# Altium PCB DIN-rail AC-DC 24V.PcbDoc
Units mm, origin at the board's own origin, x right, y up, seen from the top; angles counter-clockwise.
Board outline 80 x 106.5 mm, 2 copper layers (Top Layer, Bottom Layer), stack 1.57 mm thick; 50 components, 38 nets, 135 pads, 86 vias.
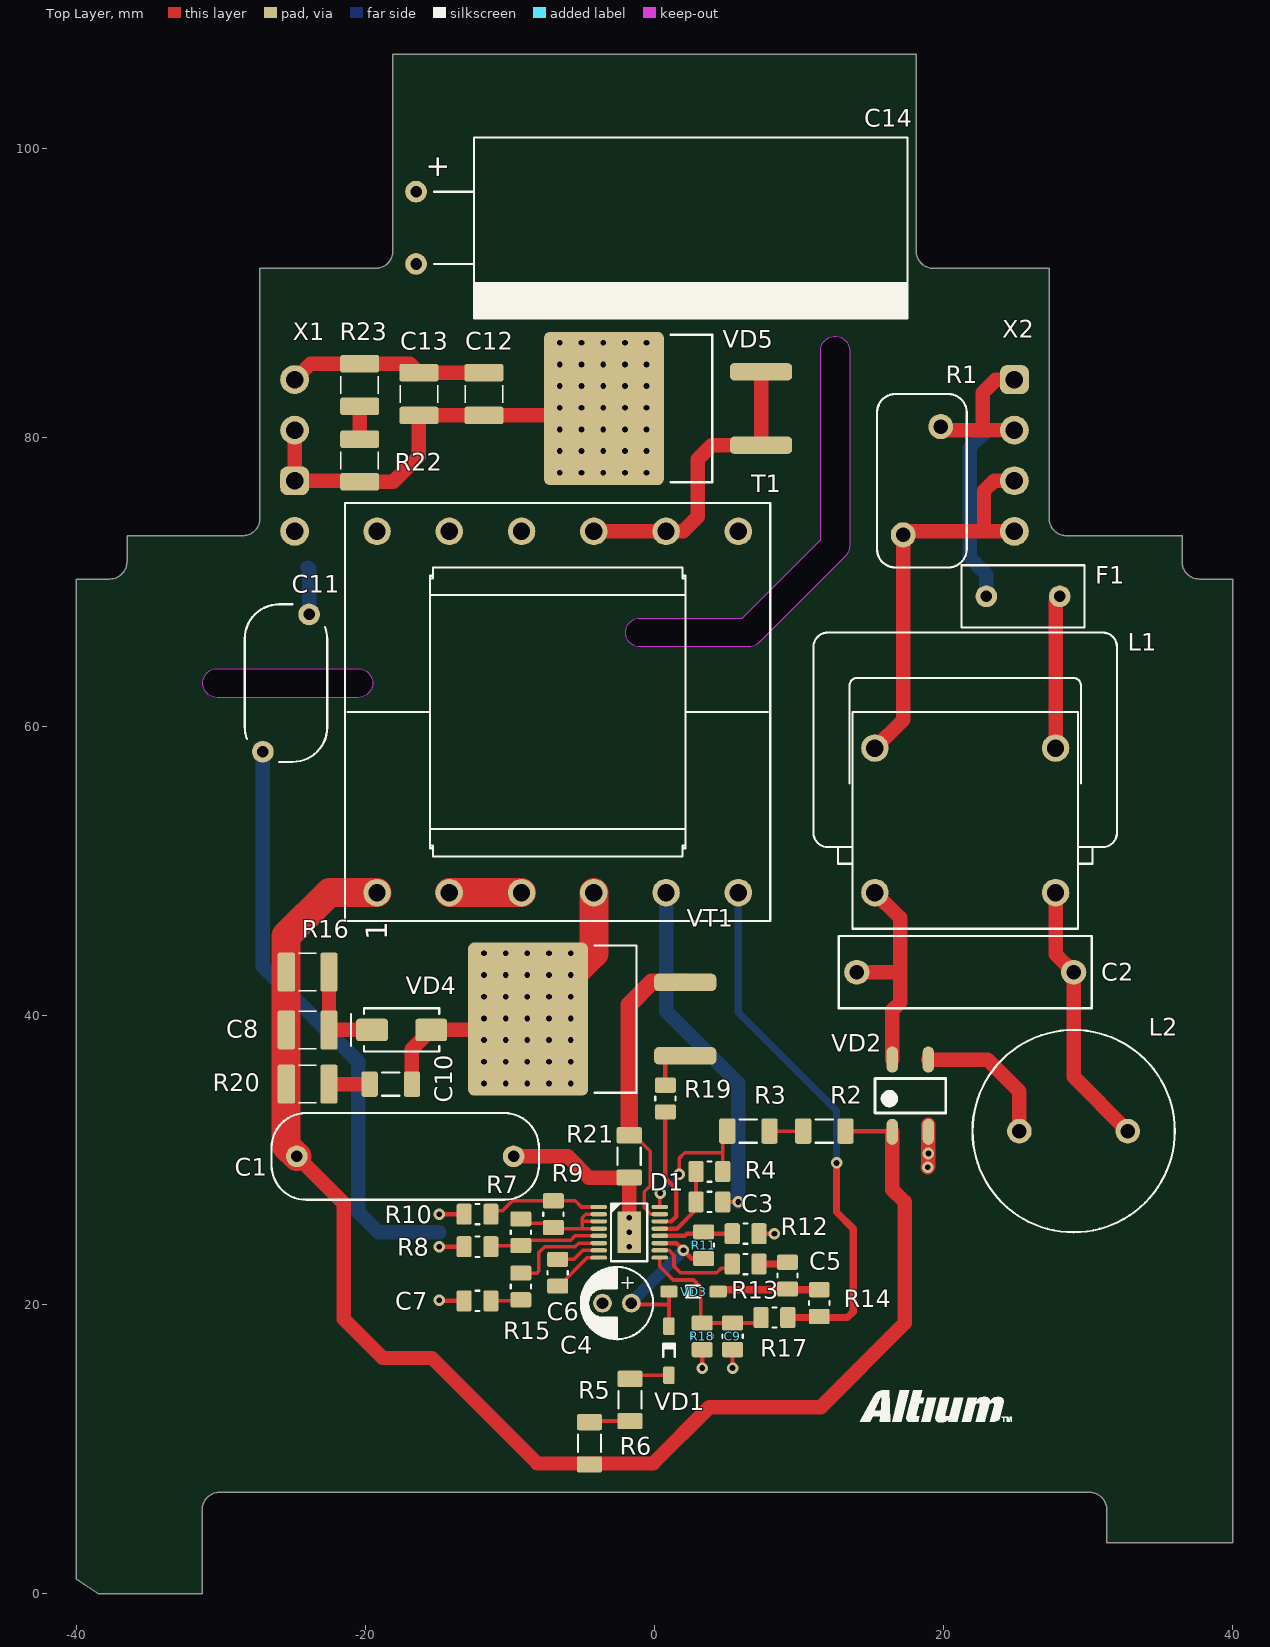
[diagram p0: Top Layer view]
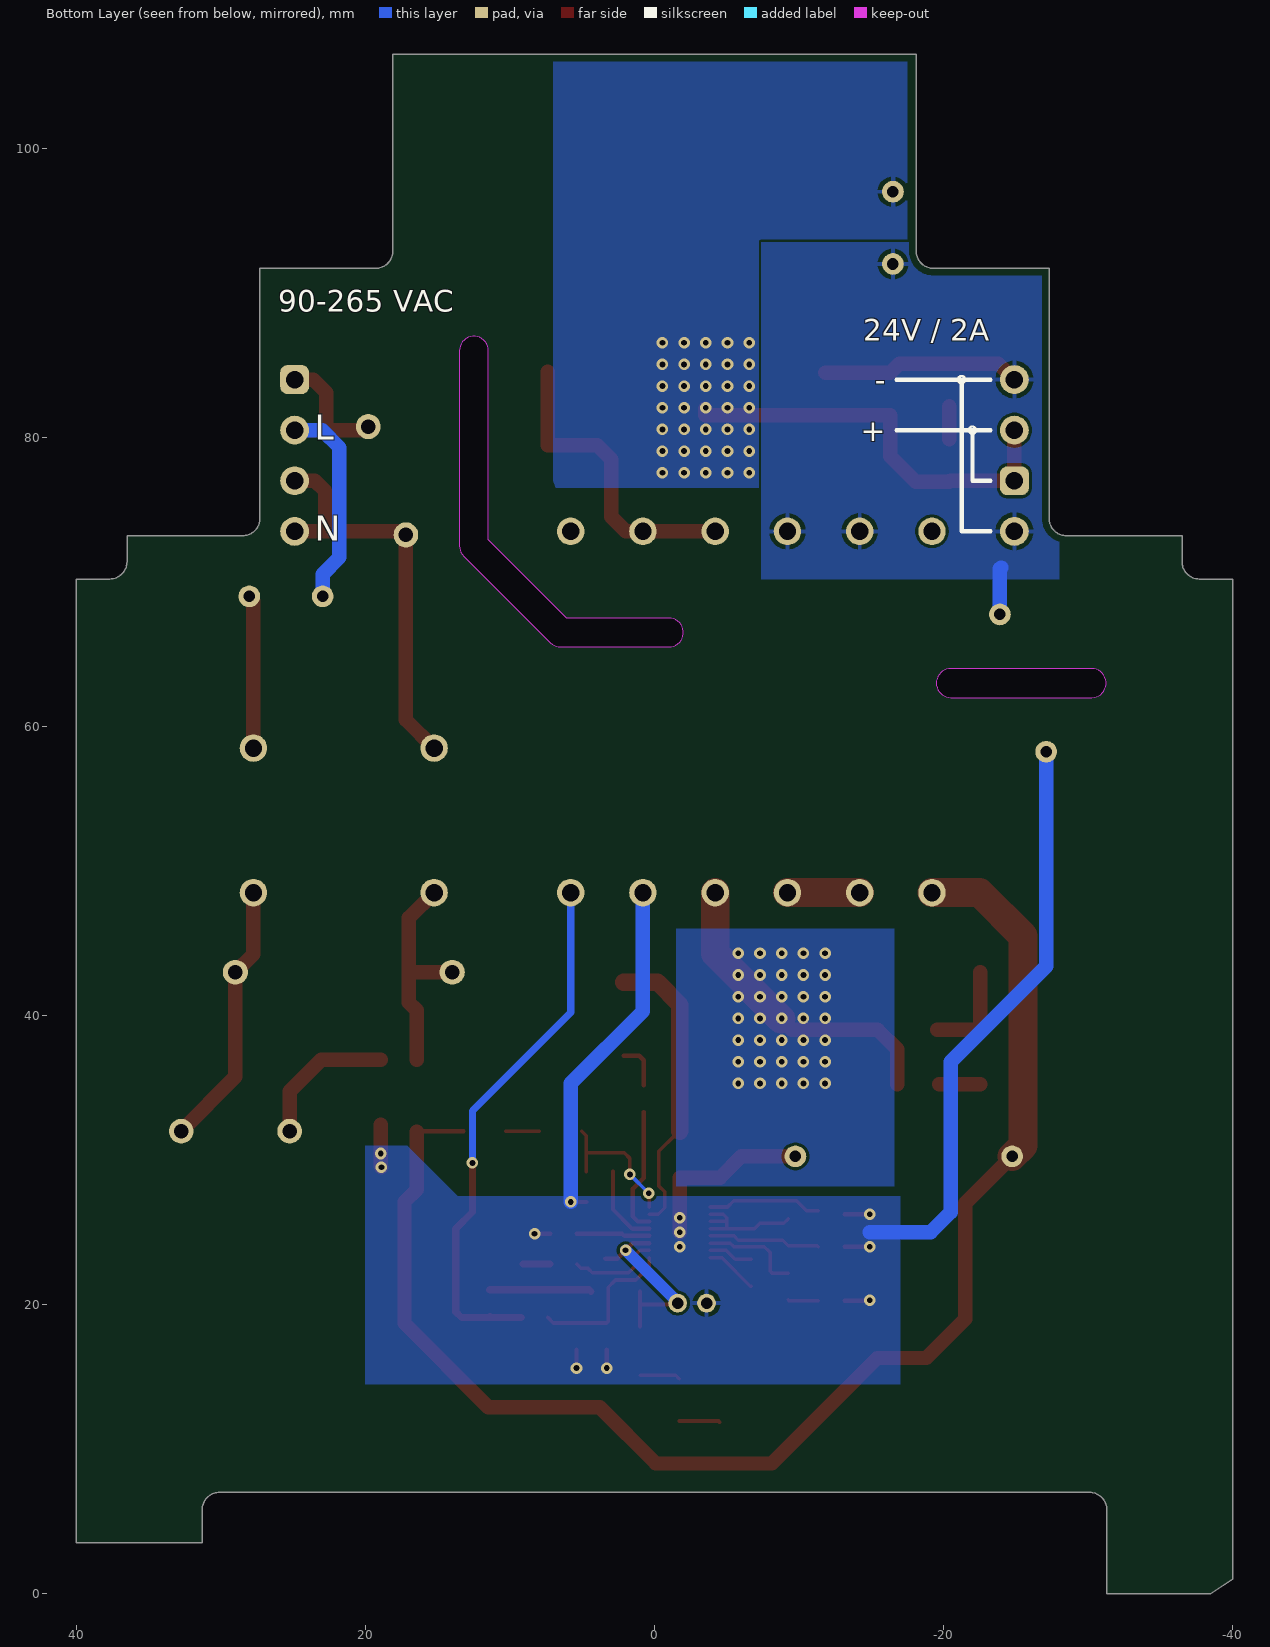
[diagram p1: Bottom Layer view, seen from below]
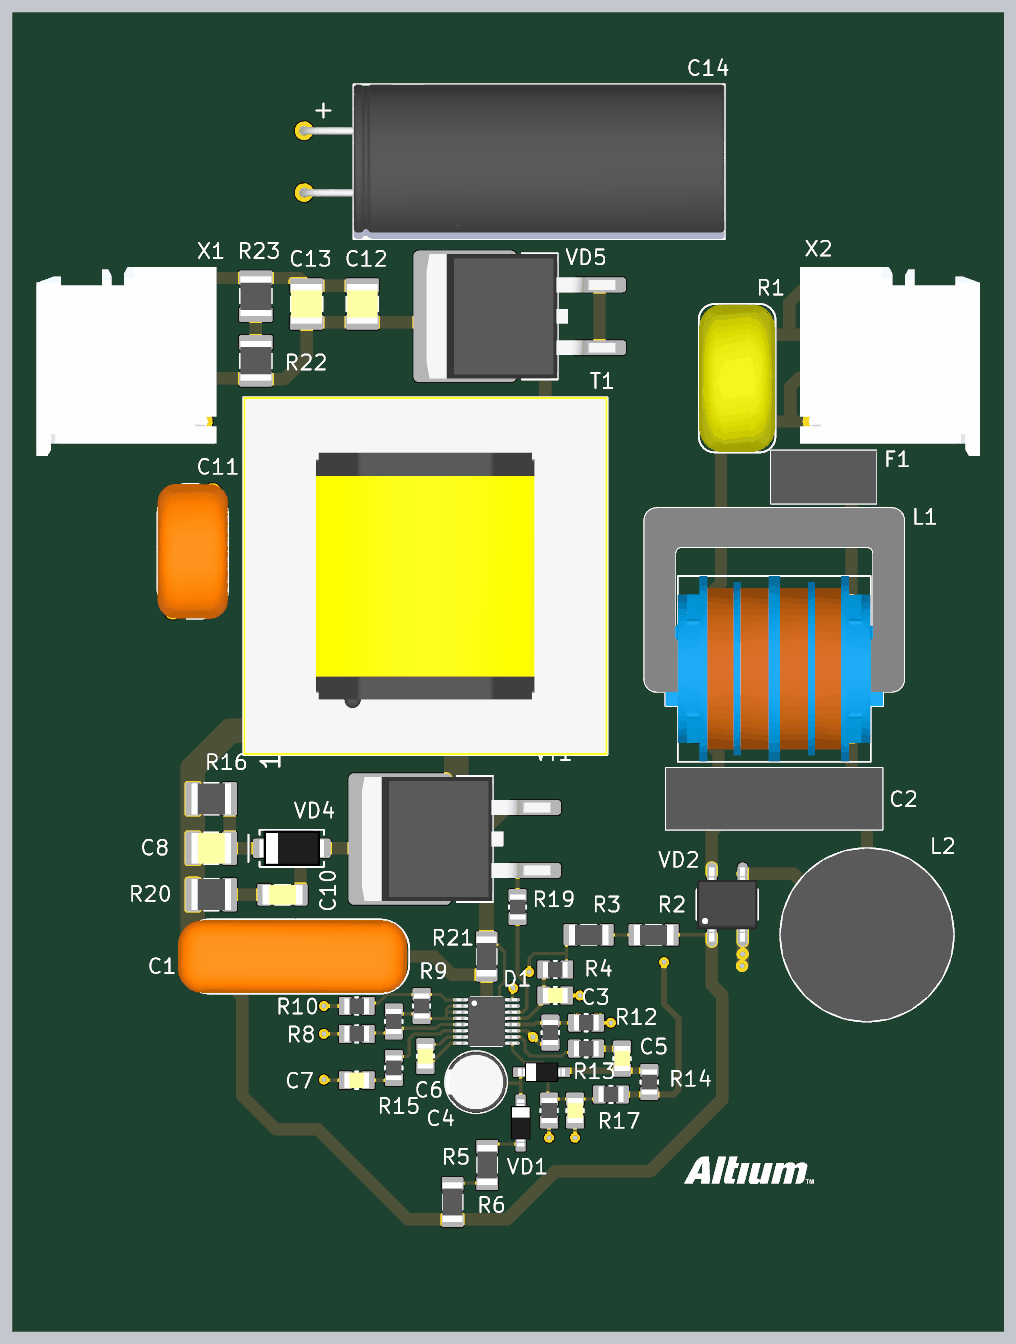
[diagram p2: 3D render of the assembled board from above, using the file's embedded part models]

## Layer stack, top to bottom
Top Solder: solder mask 0.0102, Solder Resist, Dk 3.5
Top Layer: signal copper 0.0356
Dielectric 1: core 1.4986, Core-043, Dk 4.3
Bottom Layer: signal copper 0.0356
Bottom Solder: solder mask 0.0102, Solder Resist, Dk 3.5

## Board outline
-38.5,0 -40,1 -40,70.2 -37.7,70.2 ccw(c-37.7,71.4) -36.5,71.4 -36.5,73.2 -28.5,73.2 ccw(c-28.5,74.4) -27.3,74.4 -27.3,91.7 -19.3,91.7 ccw(c-19.3,92.9) -18.1,92.9 -18.1,106.5 18.1,106.5 18.1,92.9 ccw(c19.3,92.9) 19.3,91.7 27.3,91.7 27.3,74.4 ccw(c28.5,74.4) 28.5,73.2 36.5,73.2 36.5,71.4 ccw(c37.7,71.4) 37.7,70.2 40,70.2 40,3.5 31.3,3.5 31.3,5.8 ccw(c30.1,5.8) 30.1,7 -30.1,7 ccw(c-30.1,5.8) -31.3,5.8 -31.3,0
cut-out: -30.25,62 cw(c-30.25,63) -30.25,64 -20.5,64 cw(c-20.5,63) -19.5,63 cw(c-20.5,63) -20.5,62
cut-out: -1,65.5 cw(c-1,66.5) -1,67.5 6.086,67.5 11.5,72.914 11.5,86 cw(c12.5,86) 13.5,86 13.5,72.5 cw(c12.5,72.5) 13.207,71.793 7.207,65.793 cw(c6.5,66.5) 6.5,65.5

## Design rules (kind name [scope] priority, off if disabled: settings)
BoardOutlineClearance [All] p1: gap=0.5 ignorepadtopadclearanceinfootprint=FALSE
Clearance PRIMARY-SECONDARY [InNetClass('Secondary') vs InAnyNet and not InNetClass('Secondary')] p1: gap=6 ignorepadtopadclearanceinfootprint=FALSE
Clearance [All] p2: gap=0.2 ignorepadtopadclearanceinfootprint=FALSE
ComponentClearance [All] p1: gap=0.1 collisioncheckmode=3 verticalgap=0.254 showdistances=TRUE
Creepage PRI-SEC [InNetClass('Secondary') vs InAnyNet and not InNetClass('Secondary')] p1: checkdistance=10 applytopolygonpour=TRUE
PolygonConnect [All] p1: thpad.connectstyle=Relief thpad.reliefconductorwidth=0.3 thpad.reliefentries=4 thpad.polygonreliefangle="90 Angle" thpad.airgapwidth=0.3 smdpad.connectstyle=Relief smdpad.reliefconductorwidth=0.3 smdpad.reliefentries=4 smdpad.polygonreliefangle="90 Angle" smdpad.airgapwidth=0.3 via.connectstyle=Direct via.reliefconductorwidth=0.3 via.reliefentries=4 via.polygonreliefangle="90 Angle" via.airgapwidth=0.3
RoutingVias [All] p1: holewidth=0.4 width=0.8 viastyle="Through Hole" minholewidth=0.4 minwidth=0.8 maxholewidth=0.4 maxwidth=0.8
SolderMaskExpansion vias [IsVia] p1: expansion=0.1 istentingtop=FALSE soldermaskfromhole=TRUE
SolderMaskExpansion [All] p2: expansion=0.1 istentingtop=FALSE
Width [All] p1: maxlimit=3 minlimit=0.25 preferedwidth=0.5
29 further rules are at their usual default settings.

## Classes and differential pairs
net class Secondary: GND_ISOLATED NetC12_2 NetR22_1 NetT1_8
net class HV: GND NetC1_1 NetC2_1 NetC2_2 NetC10_2 NetF1_1 NetF1_2 NetL1_1 NetL2_2 NetR2_2 NetR5_2 NetT1_2

## Components (designator, comment, footprint, x,y, rotation, side; value= is the part's Value field where it differs from the comment)
C1 "ECQE4224KF" ECQE4224XF -17.25,30.25 r0 top
C2 "ECQUAAF104M" ECUAAF104 21.5,43 r0 top
C3 "0805YD475MAT2A" C0805 3.8,27.1 r180 top
C4 "50YXJ10M5X11" CAPPRD200W60D500H1100 -2.6,20.1 r180 top
C5 "08055A220CAT2A" C0805 9.2,22 r270 top
C6 "C2012X7R1H104K" C0805 -6.7,22.2 r270 top
C7 "C2012X5R1H225K" C0805 -12.25,20.25 r0 top
C8 "GRM32A7U2J222JW31D" C1210 -24,39 r180 top
C9 "08055A220CAT2A" C0805 5.4,17.8 r270 top
C10 "1206CA470KAT1A" C1206 -18.25,35.25 r180 top
C11 "440LD22-R" 40LD22 -25.5,63 r90 top
C12 "GRM32ER7YA106KA12L" C1210 -11.8,83 r270 top
C13 "GRM32ER7YA106KA12L" C1210 -16.3,83 r270 top
C14 "ELXY350ETD102MK30S" CAPPRD500W60D1250H3000_1 -16.5,94.5 r90 top
D1 "LT3798EMSE#PBF" SOP17P50_403X490X110L53X22T284X165 -1.75,25 r0 top
F1 "SS-5F-3-15A-AP" SS-5F 25.5,69 r0 top
L1 "B82731H2701A030" B82731H 21.5,53.5 r0 top
L2 "TSL1315RA-102JR78-PF" TSL1315 29,32 r180 top
R1 "VDRS10P320BSE" VDRS10P320 18.5,77 r90 top
R2 "CRCW1206499KFKEA" R1206 11.75,32 r180 top
R3 "CRCW1206499KFKEA" R1206 6.5,32 r180 top
R4 "CRCW08050000Z0EA" R0805 3.8,29.2 r180 top
R5 "CRCW1206100KFKEA" R1206 -4.5,10.4 r90 top
R6 "CRCW1206100KFKEA" R1206 -1.7,13.4 r90 top
R7 "CRCW080510K0FKEA" R0805 -9.25,25 r90 top
R8 "CRCW080524K9FKEA" R0805 -12.25,24 r0 top
R9 "CRCW080540K2FKEA" R0805 -7,26.25 r270 top
R10 "CRCW080531K6FKEA" R0805 -12.25,26.25 r0 top
R11 "CRCW08052M40JNEA" R0805 3.4,24.1 r270 top
R12 "CRCW0805301KFKEA" R0805 6.3,24.9 r180 top
R13 "CRCW080533K0JNEA" R0805 6.3,22.8 r0 top
R14 "CRCW080568R0FKEA" R0805 11.4,20.1 r270 top
R15 "CRCW08050000Z0EA" R0805 -9.25,21.25 r90 top
R16 "CRCW121051K0JNEA" R1210 -24,43 r180 top
R17 "CRCW0805100KFKEA" R0805 8.3,19.1 r180 top
R18 "CRCW08055K49FKEA" R0805 3.3,17.8 r270 top
R19 "CRCW080520R0FKEA" R0805 0.75,34.25 r90 top
R20 "CRCW1210510RJNEA" R1210 -24,35.25 r180 top
R21 "WSL1206R0300FEA" R1206 -1.75,30.25 r90 top
R22 "CRCW1210510RJNEA" R1210 -20.4,78.4 r270 top
R23 "CRCW1210510RJNEA" R1210 -20.4,83.625 r270 top
T1 "750811248" 750811248 -6.7,61 r90 top locked
VD1 "1N4148W-7-F" SOD-123 1,16.8 r90 top
VD2 "HD06-T" SOIC250P600X300-4L 17.7,34.45 r90 top
VD3 "BAV20W-7-F" SOD-123 2.7,20.9 r180 top
VD4 "CMR1U-10M" SMA -17.5,39 r180 top
VD5 "SBR20A200CTB" D2PAK -0.5,82 r90 top
VT1 "IPB60R165CP" D2PAK -5.75,39.75 r90 top
X1 "2278364" "MCO 1,5_4-G1L-3,5 KMGY" -24.9,77 r0 top locked
X2 "2278377" "MCO 1,5_4-G1R-3,5 KMGY" 24.9,84 r0 top locked

## Footprints (in the part's own frame and the unit in brackets; to place one, negate y for a bottom-side part, rotate by r counter-clockwise, add the part's x,y. Pads: shape width x height; smd on the part's side, far side on the other; paste and mask are expansions set on the pad)
40LD22 [mm]
  round 1.5 hole 0.8: 1(-4.75,1.6) 2(4.75,-1.6)
  silkscreen extent -5.45,-2.85 5.45,2.85, body extent -5.45,-2.85 5.45,2.85, height 14.1
750811248 [mm]
  round 1.9 hole 1.2: 1(-12.5,12.5) 2(-12.5,7.5) 3(-12.5,2.5) 4(-12.5,-2.5) 5(-12.5,-7.5) 6(-12.5,-12.5) 7(12.5,-12.5) 8(12.5,-7.5) 9(12.5,-2.5) 10(12.5,2.5) 11(12.5,7.5) 12(12.5,12.5)
  silkscreen extent -14.46,-14.71 14.46,14.71, body extent -14.46,-14.71 14.46,14.71, height 23.9
B82731H [mm]
  round 1.9 hole 1.2: 1(-6.25,5) 2(6.25,5) 3(6.25,-5) 4(-6.25,-5)
  silkscreen extent -10.5,-7.5 10.5,13, body extent -10.5,-7.5 10.5,13, height 15.5
C0805 [mm]
  rrect25% 1.05x1.45 smd: 1(-0.925,0) 2(0.925,0)
  silkscreen extent -0.13,-0.7 0.13,0.7, body extent -1,-0.63 1,0.63, height 1.3
C1206 [mm]
  rrect25% 1.125x1.75 smd: 1(-1.462,0) 2(1.463,0)
  silkscreen extent -0.6,-0.8 0.6,0.8, body extent -1.6,-0.8 1.6,0.8, height 1.5
C1210 [mm]
  rrect25% 1.2x2.7 smd: 1(-1.475,0) 2(1.475,0)
  silkscreen extent -0.6,-1.3 0.6,1.3, body extent -1.6,-1.25 1.6,1.25, height 1.7
CAPPRD200W60D500H1100 [mm]
  round 1.3 hole 0.8: 1(-1,0) 2(1,0)
  silkscreen extent -2.5,-2.5 2.5,2.5, body extent -2.5,-2.5 2.5,2.5, height 11
CAPPRD500W60D1250H3000_1 [mm]
  round 1.5 hole 0.8: 1(2.5,0) 2(-2.5,0)
  silkscreen extent -6.25,-34 6.25,-1.25, body extent -6.25,-34 6.25,0.3, height 12.5
D2PAK [mm]
  rrect50% 1.2x4.3 smd: 1(-2.54,-7.874) 3(2.54,-7.874)
  rrect10% 10.6x8.3 smd: 4(0,3)
  silkscreen extent -5.1,-4.5 5.1,-1.6, body extent -5.03,-9.15 5.03,6.09, height 4.44
ECQE4224XF [mm]
  round 1.5 hole 0.8: 1(-7.5,0) 2(7.5,0)
  silkscreen extent -9.25,-3 9.25,3, body extent -9.45,-2.95 9.05,2.95, height 14
ECUAAF104 [mm]
  oval 1.75x1.7 hole 1: 1(-7.5,0) 2(7.5,0)
  silkscreen extent -8.75,-2.5 8.75,2.5, body extent -8.75,-2.5 8.75,2.5, height 12
"MCO 1,5_4-G1L-3,5 KMGY" [mm]
  rrect50% 2x2 hole 1.2: 1(0,0)
  round 2 hole 1.2: 2(0,3.5) 3(0,7) 4(0,-3.5)
  body extent -13.25,-6.3 1.3,9, height 10.97
"MCO 1,5_4-G1R-3,5 KMGY" [mm]
  rrect50% 2x2 hole 1.2: 1(0,0)
  round 2 hole 1.2: 2(0,-3.5) 3(0,-7) 4(0,-10.5)
  body extent -1.3,-13.3 13.25,2, height 10.97
R0805 [mm]
  rrect25% 1.05x1.45 smd: 1(-0.925,0) 2(0.925,0)
  silkscreen extent -0.13,-0.7 0.13,0.7, body extent -1,-0.63 1,0.63, height 0.5
R1206 [mm]
  rrect25% 1.125x1.75 smd: 1(-1.462,0) 2(1.463,0)
  silkscreen extent -0.6,-0.8 0.6,0.8, body extent -1.6,-0.8 1.6,0.8, height 0.6
R1210 [mm]
  rrect25% 1.2x2.7 smd: 1(-1.475,0) 2(1.475,0)
  silkscreen extent -0.6,-1.3 0.6,1.3, body extent -1.6,-1.25 1.6,1.25, height 0.6
SMA [mm]
  rrect25% 2.2x1.55 smd: 1(-2.05,0) 2(2.05,0)
  silkscreen extent -2.6,-1.5 3.5,1.5, body extent -2.6,-1.45 2.6,1.45, height 2.6
SOD-123 [mm]
  rrect25% 1.2x0.8 smd: 1(-1.7,0) 2(1.7,0)
  silkscreen extent -0.42,-0.4 0.57,0.4, body extent -1.9,-0.8 1.9,0.8, height 1.36
SOIC250P600X300-4L [mm]
  oval 1.8x0.8 smd: 1(-2.5,1.25) 2(-2.5,-1.25) 3(2.5,-1.25) 4(2.5,1.25)
  silkscreen extent -1.2,-2.45 1.2,2.45, body extent -3,-2.45 3,2.45, height 3
SOP17P50_403X490X110L53X22T284X165 [mm]
  oval 1.15x0.3 smd mask+0.05: 1(-2.109,1.75) 2(-2.109,1.25) 3(-2.109,0.75) 4(-2.109,0.25) 5(-2.109,-0.25) 6(-2.109,-0.75) 7(-2.109,-1.25) 8(-2.109,-1.75) 9(2.109,-1.75) 10(2.109,-1.25) 11(2.109,-0.75) 12(2.109,-0.25) 13(2.109,0.25) 14(2.109,0.75) 15(2.109,1.25) 16(2.109,1.75)
  rect 1.65x2.85 smd mask+0.05: 17(0,0)
  silkscreen extent -1.25,-2 1.25,2, body extent -2.45,-2 2.45,2, height 1.1
SS-5F [mm]
  round 1.5 hole 0.8: 1(-2.54,0) 2(2.54,0)
  silkscreen extent -4.25,-2.15 4.25,2.15, body extent -4.25,-2.15 4.25,2.15, height 8.35
TSL1315 [mm]
  round 1.7 hole 1: 1(-3.75,0) 2(3.75,0)
  silkscreen extent -7,-7 7,7, body extent -7,-7 7,7, height 17
VDRS10P320 [mm]
  oval 1.75x1.7 hole 1: 1(-3.75,1.3) 2(3.75,-1.3)
  silkscreen extent -6,-3.1 6,3.1, body extent -6,-3.1 6,3.1, height 15

## Part data
C1: library part CMP-00002-6, "Film Capacitor, Polyester, 400V, 10% +Tol, 10% -Tol, 0.22uF, Through Hole Mount", Capacitance=220nF, Dielectric=Polyester, Temp H=105°C, Temp L=-40°C, Tolerance=10%, Voltage=400V, Series=ECQE
C2: library part CMP-00001-5, "Film Capacitor, Polypropylene, 20% +Tol, 20% -Tol, 0.1uF, Through Hole Mount", Capacitance=100nF, Dielectric=Polypropylene, Temp H=110°C, Temp L=-40°C, Tolerance=20%, Voltage=275V, Series=ECQUA
C3: library part CMP-00008-3, "Ceramic Capacitor, Multilayer, Ceramic, 16V, 20% +Tol, 20% -Tol, X5R, 15% TC, 4.7uF, Surface Mount, 0805", Capacitance=470nF, Dielectric=X5R, Temp H=85°C, Temp L=-55°C, Tolerance=20%, Voltage=16V, Series=-
C4: library part CMP-00003-3, "Aluminum Electrolytic Capacitor, Polarized, Aluminum (wet), 50V, 20% +Tol, 20% -Tol, 10uF, Through Hole Mount", Capacitance=10µF, Dielectric="Al oxide", Temp H=105°C, Temp L=-40°C, Tolerance=20%, Voltage=50V, Series=YXJ
C5 C9: library part CMP-00005-2, "Ceramic Capacitor, Ceramic, 50V, 1.1364% +Tol, 1.1364% -Tol, C0G, -/+30ppm/Cel TC, 0.000022uF, 0805", Capacitance=22pF, Dielectric=NP0, Temp H=125°C, Temp L=-55°C, Voltage=50V, Series=-
C6: library part CMP-00006-4, "Ceramic Capacitor, Multilayer, Ceramic, 50V, 10% +Tol, 10% -Tol, X7R, 15% TC, 0.1uF, Surface Mount, 0805", Capacitance=100nF, Dielectric=X7R, Temp H=125°C, Temp L=-55°C, Tolerance=10%, Voltage=50V, Series=C
C7: library part CMP-00007-3, "Cap Ceramic 2.2uF 50V X5R 10% SMD 0805 85C T/R", Capacitance=2.2µF, Dielectric=X5R, Temp H=85°C, Temp L=-55°C, Tolerance=10%, Voltage=50V, Series=C
C8: library part CMP-00000-3, "Ceramic Capacitor, Multilayer, Ceramic, 630V, 5% +Tol, 5% -Tol, U2J, -750+/-120ppm/Cel TC, 0.0022uF, Surface Mount, 1210", Capacitance=2.2nF, Dielectric=U2J, Temp H=125°C, Temp L=-55°C, Tolerance=5%, Voltage=630V, Series=GRM
C10: library part CMP-00011-1, "Ceramic Capacitor, Multilayer, Ceramic, 630V, 10% +Tol, 10% -Tol, C0G, 30ppm/Cel TC, 0.000047uF, Surface Mount, 1206", Capacitance=47pF, Dielectric=NP0, Temp H=125°C, Temp L=-55°C, Tolerance=10%, Voltage=630V, Series=-
C11: library part CMP-00004-1, "Ceramic Capacitor, Ceramic, 20% +Tol, 20% -Tol, Y5U, -56/+22% TC, 0.0022uF, Through Hole Mount", Capacitance=2.2nF, Dielectric=Y5U, Temp H=125°C, Temp L=-30°C, Tolerance=20%, Voltage=760V, Series="Cera-Mite 440L"
C12 C13: library part CMP-00010-1, "Ceramic Capacitor, Multilayer, Ceramic, 35V, 10% +Tol, 10% -Tol, X7R, 15% TC, 10uF, Surface Mount, 1210", Capacitance=10µF, Dielectric=X7R, Temp H=125°C, Temp L=-55°C, Tolerance=20%, Voltage=35V, Series=GRM
C14: library part CMP-00009-4, "Aluminum Electrolytic Capacitor, Polarized, Aluminum (wet), 35V, 20% +Tol, 20% -Tol, 1000uF, Through Hole Mount", Capacitance=1nF, Dielectric="Al oxide", Temp H=105°C, Temp L=-55°C, Tolerance=20%, Voltage=35V, Series=LXY
D1: library part CMP-00048-2, "Power Factor Controller, Current-mode, 150kHz Switching Freq-Max, BIPolar, PDSO16", Temp H=-40°C, Temp L=125°C
F1: library part CMP-00049-1, "Electric Fuse", Current=3.15A, Temp H=-40°C, Temp L=85°C, Series=SS-5F
L1: library part CMP-00018-3, "General Purpose Inductor, 27000uH, 50%, 2 Element, Ferrite-Core", Current=700mA, Inductance=27mH, Temp H=125°C, Temp L=-40°C, Voltage=250V, Series=B82731
L2: library part CMP-00019-1, "General Purpose Inductor, 1000uH, 5%, 1 Element", Current=780mA, Inductance=1mH, Temp H=85°C, Temp L=-20°C, Tolerance=5%, Series=TSL
R1: library part CMP-00047-1, "Varistor, 420V, 77J, Through Hole Mount", Current=2.5kA, Temp H=85°C, Temp L=-40°C, Voltage=510V, Energy=77, Series=VDRS
R2 R3: library part CMP-00037-1, "Fixed Resistor, Metal Glaze/thick Film, 0.25W, 499000ohm, 200V, 1% +/-Tol, 100ppm/Cel, Surface Mount, 1206", Power=250mW, Resistance=499k, Temp Coeff=±100ppm, Temp H=155°C, Temp L=-55°C, Tolerance=1%, Composition="Thik Film", Series=CRCW
R4 R15: library part CMP-00040-1, "Fixed Resistor, Metal Glaze/thick Film, 0.125W, 0ohm, Surface Mount, 0805", Power=125mW, Resistance=0, Temp Coeff=-, Temp H=155°C, Temp L=-55°C, Tolerance=0%, Composition="Thick Film", Series=CRCW
R5 R6: library part CMP-00016-3, "Fixed Resistor, Metal Glaze/thick Film, 0.25W, 100000ohm, 200V, 1% +/-Tol, 100ppm/Cel, Surface Mount, 1206", Power=250mW, Resistance=100k, Temp Coeff=±100ppm, Temp H=155°C, Temp L=-55°C, Tolerance=1%, Composition="Thik Film", Series=CRCW
R7: library part CMP-00041-1, "Fixed Resistor, Metal Glaze/thick Film, 0.125W, 10000ohm, 150V, 1% +/-Tol, 100ppm/Cel, Surface Mount, 0805", Power=125mW, Resistance=10k, Temp Coeff=±100ppm, Temp H=155°C, Temp L=-55°C, Tolerance=1%, Composition="Thick Film", Series=CRCW
R8: library part CMP-00045-1, "Fixed Resistor, Metal Glaze/thick Film, 0.125W, 24900ohm, 150V, 1% +/-Tol, 100ppm/Cel, Surface Mount, 0805", Power=125mW, Resistance=24.9k, Temp Coeff=±100ppm, Temp H=155°C, Temp L=-55°C, Tolerance=1%, Composition="Thick Film", Series=CRCW
R9: library part CMP-00042-1, "Fixed Resistor, Metal Glaze/thick Film, 0.125W, 40200ohm, 150V, 1% +/-Tol, 100ppm/Cel, Surface Mount, 0805", Power=125mW, Resistance=40.2k, Temp Coeff=±100ppm, Temp H=155°C, Temp L=-55°C, Tolerance=1%, Composition="Thick Film", Series=CRCW
R10: library part CMP-00043-1, "Fixed Resistor, Metal Glaze/thick Film, 0.125W, 31600ohm, 150V, 1% +/-Tol, 100ppm/Cel, Surface Mount, 0805", Power=125mW, Resistance=31.6k, Temp Coeff=±100ppm, Temp H=155°C, Temp L=-55°C, Tolerance=1%, Composition="Thick Film", Series=CRCW
R11: library part CMP-00039-1, "Fixed Resistor, Metal Glaze/thick Film, 0.125W, 2400000ohm, 150V, 5% +/-Tol, 200ppm/Cel, Surface Mount, 0805", Power=125mW, Resistance=2.4M, Temp Coeff=±200ppm, Temp H=155°C, Temp L=-55°C, Tolerance=5%, Composition="Thick Film", Series=CRCW
R12: library part CMP-00044-1, "Fixed Resistor, Metal Glaze/thick Film, 0.125W, 301000ohm, 150V, 1% +/-Tol, 100ppm/Cel, Surface Mount, 0805", Power=125mW, Resistance=301k, Temp Coeff=±100ppm, Temp H=155°C, Temp L=-55°C, Tolerance=1%, Composition="Thick Film", Series=CRCW
R13: library part CMP-00033-1, "Fixed Resistor, Metal Glaze/thick Film, 0.125W, 33000ohm, 150V, 5% +/-Tol, 200ppm/Cel, Surface Mount, 0805", Power=125mW, Resistance=33k, Temp Coeff=±200ppm, Temp H=155°C, Temp L=-55°C, Tolerance=5%, Composition="Thick Film", Series=CRCW
R14: library part CMP-00030-1, "Fixed Resistor, Metal Glaze/thick Film, 0.125W, 68ohm, 150V, 1% +/-Tol, 100ppm/Cel, Surface Mount, 0805", Power=125mW, Resistance=68, Temp Coeff=±100ppm, Temp H=155°C, Temp L=-55°C, Tolerance=1%, Composition="Thick Film", Series=CRCW
R16: library part CMP-00038-1, "Fixed Resistor, Metal Glaze/thick Film, 0.5W, 51000ohm, 200V, 5% +/-Tol, 200ppm/Cel, Surface Mount, 1210", Power=500mW, Resistance=51k, Temp Coeff=±200ppm, Temp H=155°C, Temp L=-55°C, Tolerance=5%, Composition="Thik Film", Series=CRCW
R17: library part CMP-00020-3, "Fixed Resistor, Metal Glaze/thick Film, 0.25W, 100000ohm, 200V, 1% +/-Tol, 100ppm/Cel, Surface Mount, 1206", Power=125mW, Resistance=100k, Temp Coeff=±100ppm, Temp H=155°C, Temp L=-55°C, Tolerance=1%, Composition="Thik Film", Series=CRCW
R18: library part CMP-00021-2, "Fixed Resistor, Metal Glaze/thick Film, 0.125W, 5490ohm, 150V, 1% +/-Tol, 100ppm/Cel, Surface Mount, 0805", Power=125mW, Resistance=5.49k, Temp Coeff=±100ppm, Temp H=155°C, Temp L=-55°C, Tolerance=1%, Composition="Thick Film", Series=CRCW
R19: library part CMP-00032-1, "Fixed Resistor, Metal Glaze/thick Film, 0.125W, 20ohm, 150V, 1% +/-Tol, 100ppm/Cel, Surface Mount, 0805", Power=125mW, Resistance=20, Temp Coeff=±100ppm, Temp H=155°C, Temp L=-55°C, Tolerance=1%, Composition="Thick Film", Series=CRCW
R20 R22 R23: library part CMP-00035-1, "Fixed Resistor, Metal Glaze/thick Film, 0.5W, 510ohm, 200V, 5% +/-Tol, 200ppm/Cel, Surface Mount, 1210", Power=500mW, Resistance=510, Temp Coeff=±200ppm, Temp H=155°C, Temp L=-55°C, Tolerance=5%, Composition="Thik Film", Series=CRCW
R21: library part CMP-00034-1, "Fixed Resistor, Metal Strip, 0.25W, 0.03ohm, 0.0866V, 1% +/-Tol, 75ppm/Cel, Surface Mount, 1206", Power=250mW, Resistance=30m, Temp Coeff=±75ppm, Temp H=170°C, Temp L=-60°C, Tolerance=1%, Composition="Metal Element", Series=CRCW
T1: library part CMP-00025-1, "Datacom Transformer", Temp H=125°C, Temp L=-40°C, Transformer Type="DATACOM TRANSFORMER"
VD1: library part CMP-00015-1, "Rectifier Diode, 1 Phase, 1 Element, 0.15A, 100V V(RRM), Silicon", Current=300mA, Reverse Voltage=100V, Temp H=150°C, Temp L=-65°C, Series=-
VD2: library part CMP-00022-2, "Bridge Rectifier Diode, 1 Phase, 0.8A, 600V V(RRM), Silicon", Current=800mA, Reverse Voltage=600V, Temp H=150°C, Temp L=-55°C, Series=-
VD3: library part CMP-00013-1, "Rectifier Diode, 1 Phase, 1 Element, 0.4A, 150V V(RRM), Silicon", Current=200mA, Reverse Voltage=150V, Temp H=150°C, Temp L=-65°C, Series=-
VD4: library part CMP-00012-1, "Rectifier Diode, 1 Phase, 1 Element, 1A, 1000V V(RRM)", Current=1A, Reverse Voltage=1kV, Temp H=175°C, Temp L=-65°C, Series=-
VD5: library part CMP-00014-1, "Rectifier Diode, 1 Phase, 2 Element, 20A, 200V V(RRM), Silicon, TO-263AB", Current=10A, Reverse Voltage=200V, Temp H=175°C, Temp L=-65°C, Series=SBR
VT1: library part CMP-00017-1, "Power Field-Effect Transistor, 21A I(D), 600V, 0.165ohm, 1-Element, N-Channel, Silicon, Metal-oxide Semiconductor FET, TO-263AB", Current=21A, Power=192W, Temp H=150°C, Temp L=-55°C, FET type=N-Channel, Series=CoolMOS, Vdss=600V
X1: library part CMP-00051-1, "Barrier Strip Terminal Block", Current=8A, Voltage=320V, PinCount=4, Series="COMBICON MCO"
X2: library part CMP-00050-1, "Strip Terminal Block, 8A, 1 Row(s), 1 Deck(s)", Current=8A, Voltage=320V, PinCount=4, Series="COMBICON MCO"

## Via types
v1: diameter 0.8, hole 0.4, Top Layer to Bottom Layer, 86 vias

## Nets (pads, with @x,y where several pads share a name; then routed paths per layer and width w, separated by ;. In a path a pad name is that pad's centre, name@x,y a point inside that pad or via, vN(x,y) a via of type N, cw(c..) or ccw(c..) an arc to the next point about the centre after c; other vN are vias at no path point)
GND: C1.2 C3.1 C4.2 C7.1 C9.2 C11.1 D1.17 R8.1 R10.1 R12.1 R18.2 R21.1 T1.5 VD2.2 | length 89.5
  Top Layer w0.3: v1(-14.9,20.3) -14.85,20.25 C7.1 ; v1(-14.9,24) R8.1 ; v1(-14.9,26.25) R10.1 ; v1(3.3,15.6) R18.2 ; C3.1 v1(5.8,27.1) ; v1(5.4,15.6) C9.2 ; R12.1 v1(8.3,24.9)
  Top Layer w1: C1.2 -6,30.25 -4.538,28.788 R21.1 v1(-1.75,25) ; v1(18.9,29.5) 18.95,29.55 v1(18.95,30.45) VD2.2 VD2.2@18.95,32.45
  Bottom Layer w1: C11.1 -27.1,43.4 -20.5,36.8 -20.5,26.4 -19.1,25 -14.9,25 ; T1.5 0.8,40.3 5.8,35.3 v1(5.8,27.1)
  other v1: -1.75,24 -1.75,26
GND_ISOLATED: C11.2 C12.1 C13.1 C14.2 R23.1 T1.10 T1.11 X1.3 X1.4 | length 17.1
  Top Layer w1: X1.3 -23.8,85.1 R23.1 -16.925,85.1 C13.1 C12.1
  Bottom Layer w1: -24,71 -23.9,70.9 C11.2
INTVCC: C3.2 D1.13 R4.2 | length 5.7
  Top Layer w0.3: D1.13 1.55,25.25 2.875,26.575 C3.2 R4.2
NetC1_1: C1.1 C8.2 R2.1 R5.1 R16.2 R20.2 T1.1 VD2.1 | length 99.5
  Top Layer w0.3: R2.1 16.4,32 VD2.1
  Top Layer w1: C1.1 -21.5,27 -21.5,19 -18.8,16.3 -15.4,16.3 -8.1,9 -5.038,9 -0.1,9 3.8,12.9 11.5,12.9 17.3,18.7 17.3,27.1 16.45,27.95 VD2.1
  Top Layer w2: C1.1 -25.5,31 -25.5,35.25 -25.5,39 -25.5,43 -25.5,45.5 -22.5,48.5 T1.1
NetC2_1: C2.1 L1.4 VD2.4 | length 15.5
  Top Layer w1: C2.1 17,43 ; L1.4 17,46.75 17,43 ; VD2.4 16.45,40.35 17,40.9 17,43
NetC2_2: C2.2 L1.3 L2.1 | length 18.6
  Top Layer w1: L1.3 27.75,44.25 C2.2 29,35.75 L2.1
NetC4_1: C4.1 D1.11 R11.2 VD1.2 VD3.2 | length 13.6
  Top Layer w0.3: C4.1 -1.5,20 1,20 ; D1.11 1.5,24.25 v1(2,23.75) 2.575,23.175 R11.2 ; VD1.2 1,20 ; VD3.2 1,20
  Bottom Layer w0.8: C4.1@-1.6,20.15 v1(2,23.75)
NetC5_1: C5.1 R13.2 | length 1.9
  Top Layer w0.5: R13.2 C5.1@9.075,22.8
NetC5_2: C5.2 R14.1 VD3.1 | length 7.1
  Top Layer w0.5: VD3.1 4.525,21.025 R14.1
NetC6_1: C6.1 D1.7 | length 3.1
  Top Layer w0.25: C6.1 -5.575,23.125 -4.95,23.75 D1.7
NetC6_2: C6.2 D1.8 | length 3.7
  Top Layer w0.25: C6.2 -6.625,21.275 -4.65,23.25 D1.8
NetC7_2: C7.2 R15.1 | length 2.1
  Top Layer w0.25: C7.2 -9.325,20.25 R15.1
NetC8_1: C8.1 R16.1 VD4.2 | length 7
  Top Layer w1: R16.1 C8.1 VD4.2
NetC9_1: C9.1 D1.9 R17.2 R18.1 | length 10.8
  Top Layer w0.2: R18.1@3.2,18.825 R18.1
  Top Layer w0.25: D1.9 0.359,22.641 1.3,21.7 2.7,21.7 3.2,21.2 R18.1@3.2,18.825 ; R18.1 C9.1 7,18.725 R17.2
NetC10_1: C10.1 T1.4 VD4.1 VT1.4 | length 21.9
  Top Layer w1: C10.1 -16.788,37.662 VD4.1 -9.5,39 VT1.4
  Top Layer w2: VT1.4 -4.2,44.3 T1.4
  other v1: -11.8,35.3 -10.3,35.3 -8.8,35.3 -7.3,35.3 -5.8,35.3 -11.8,36.8 -10.3,36.8 -8.8,36.8 -7.3,36.8 -5.8,36.8 -11.8,38.3 -10.3,38.3 -8.8,38.3 -7.3,38.3 -5.8,38.3 -11.8,39.8 -10.3,39.8 -8.8,39.8 -7.3,39.8 -5.8,39.8 -11.8,41.3 -10.3,41.3 -8.8,41.3 -7.3,41.3 -5.8,41.3 -11.8,42.8 -10.3,42.8 -8.8,42.8 -7.3,42.8 -5.8,42.8 -11.8,44.3 -10.3,44.3 -8.8,44.3 -7.3,44.3 -5.8,44.3
NetC10_2: C10.2 R20.1 | length 2.8
  Top Layer w1: R20.1 C10.2
NetC12_2: C12.2 C13.2 C14.1 R22.2 VD5.4 X1.1 X1.2 | length 29
  Top Layer w1: X1.2 X1.1 -20.475,77 R22.2 -18.075,76.925 -16.3,78.7 C13.2 C12.2 -3.5,81.525 VD5.4
  other v1: -6.55,77.55 -5.05,77.55 -3.55,77.55 -2.05,77.55 -0.55,77.55 -6.55,79.05 -5.05,79.05 -3.55,79.05 -2.05,79.05 -0.55,79.05 -6.55,80.55 -5.05,80.55 -3.55,80.55 -2.05,80.55 -0.55,80.55 -6.55,82.05 -5.05,82.05 -3.55,82.05 -2.05,82.05 -0.55,82.05 -6.55,83.55 -5.05,83.55 -3.55,83.55 -2.05,83.55 -0.55,83.55 -6.55,85.05 -5.05,85.05 -3.55,85.05 -2.05,85.05 -0.55,85.05 -6.55,86.55 -5.05,86.55 -3.55,86.55 -2.05,86.55 -0.55,86.55
NetD1_1: D1.1 R9.1 R10.2 | length 7.9
  Top Layer w0.25: R10.2@-11.325,26.5 -10.502,26.5 -9.827,27.175 R9.1 -5.475,27.175 -5.05,26.75 D1.1
NetD1_2: D1.2 D1.3 D1.4 R7.2 R9.2 | length 8.8
  Top Layer w0.25: R7.2 -8.95,25.625 -7.3,25.625 R9.2 -6.925,25.25 -5,25.25 ; D1.4 -5,25.25 ; D1.3 -5,25.75 ; D1.2 -4.75,26.25 -5,26 -5,25.75 ; -5,25.25 -5,25.75
NetD1_5: D1.5 R7.1 R8.2 | length 7.8
  Top Layer w0.25: R8.2 -11.25,24.075 R7.1 -8.875,24.45 -5.8,24.45 -5.5,24.75 D1.5
NetD1_6: D1.6 R15.2 | length 7
  Top Layer w0.25: R15.2 -8.125,22.175 -8,22.3 -8,23.6 -7.6,24 -5.5,24 -5.25,24.25 D1.6
NetD1_10: D1.10 R13.1 | length 6.3
  Top Layer w0.25: D1.10 1,23.75 1.348,23.402 1.348,22.652 1.8,22.2 4.3,22.2 4.6,22.5 5.075,22.5 R13.1
NetD1_12: D1.12 R11.1 R12.2 | length 5.1
  Top Layer w0.3: D1.12 2.1,24.75 2.25,24.9 R12.2
NetD1_14: D1.14 R19.1 | length 8.8
  Top Layer w0.3: D1.14 1.155,25.75 1.5,26.095 1.5,28 0.75,28.75 R19.1
NetD1_15: D1.15 R21.2 VT1.3 | length 20.5
  Top Layer w0.25: R21.2 -1.413,31.713 -0.3,30.6 -0.3,28.2 -0.7,27.8 -0.7,26.7 -0.25,26.25 D1.15
  Top Layer w1.2: R21.2@-1.75,32 -1.75,40.75 -0.21,42.29 VT1.3
NetD1_16: D1.16 R3.2 R4.1 | length 10
  Top Layer w0.25: D1.16 0.359,27.659 v1(0.4,27.7) ; v1(1.7,29) 1.7,30.1 2.1,30.5 4.725,30.5 ; R4.1 4.725,30.5 ; R3.2 4.725,31.687 4.725,30.5
  Bottom Layer w0.25: v1(0.4,27.7) v1(1.7,29)
NetF1_1: F1.1 R1.2 X2.1 X2.2 | length 24.8
  Top Layer w1: R1.2 20.05,80.5 22.7,80.5 ; X2.2 22.7,80.5 ; X2.1 23.6,84 22.7,83.1 22.7,80.5
  Bottom Layer w1: F1.1 22.96,70.54 21.8,71.7 21.8,79.3 23,80.5 X2.2
NetF1_2: F1.2 L1.2 | length 10.6
  Top Layer w1: L1.2 27.75,68.71 F1.2
NetL1_1: L1.1 R1.1 X2.3 X2.4 | length 28.6
  Top Layer w1: L1.1 17.2,60.45 R1.1 17.45,73.5 22.8,73.5 ; X2.4 22.8,73.5 ; X2.3 23.5,77 22.8,76.3 22.8,73.5
NetL2_2: L2.2 VD2.3 | length 10
  Top Layer w1: VD2.3 23.05,36.95 25.25,34.75 L2.2
NetR2_2: R2.2 R3.1 | length 2.3
  Top Layer w0.25: R3.1 R2.2
NetR5_2: R5.2 R6.1 | length 2.8
  Top Layer w0.25: R5.2 -4.425,11.938 R6.1
NetR6_2: R6.2 VD1.1 | length 2.8
  Top Layer w0.25: R6.2 -1.462,15.1 VD1.1
NetR14_2: R14.2 R17.1 T1.6 | length 37
  Top Layer w0.5: R17.1 R14.2@11.4,19.1 ; R14.2 11.475,19.1 13.35,19.1 13.75,19.5 13.75,25.25 12.6,26.4 v1(12.6,29.8)
  Bottom Layer w0.5: T1.6 5.8,40.2 12.6,33.4 v1(12.6,29.8)
NetR19_2: R19.2 VT1.1 | length 3.2
  Top Layer w0.3: R19.2 0.75,36.9 1.06,37.21 VT1.1
NetR22_1: R22.1 R23.2 | length 2.3
  Top Layer w1: R22.1 R23.2
NetT1_2: T1.2 T1.3 | length 5
  Top Layer w2: T1.2 T1.3
NetT1_8: T1.8 T1.9 VD5.1 VD5.3 | length 21.5
  Top Layer w1: T1.9 T1.8 2,73.5 3,74.5 3,78.5 3.96,79.46 VD5.1 VD5.3
pads on no net: T1.7 T1.12

## Polygon pours and split planes (outlines as drawn)
GND on Bottom Layer "GND_L02_P001" (solid, remove dead copper, pour order 1): -17,27.5 13.6,27.5 17.1,31 20,31 20,14.5 -17,14.5
NetC12_2 on Bottom Layer "NETC12_2_L02_P003" (solid, remove dead copper, pour order 3): -17.5,76.5 7,76.5 7,106 -17.5,106
NetC10_1 on Bottom Layer "NETC10_1_L02_P002" (solid, remove dead copper, pour order 2): -16.6,46 -1.5,46 -1.5,28.2 -16.6,28.2
GND_ISOLATED on Bottom Layer "GND_ISOLATED_L02_P000" (solid, pour order 0): -28,70.2 -7.4,70.2 -7.4,93.5 -28,93.5

## Silkscreen, mask and mechanical layers (free items; w line width, h text height)
Top Overlay:
  region: 18.242,11.888 17.61,11.888 cw(c17.66,12.116) 17.427,12.121 17.427,12.186 17.899,14.068 18.524,14.068 18.395,13.557 18.654,13.557 18.562,13.176 18.303,13.176 18.097,12.376 18.097,12.349 ccw(c18.185,12.349) 18.185,12.262 18.336,12.262
  region: 20.428,12.345 ccw(c20.389,12.384) 20.444,12.384 20.749,13.557 21.374,13.557 20.963,11.888 20.338,11.888 20.376,12.071 20.368,12.071 20.289,11.992 cw(c19.947,12.333) 19.947,11.85 19.718,11.85 cw(c19.718,12.13) 19.439,12.13 19.439,12.186 19.774,13.557 20.399,13.557 20.117,12.422 20.117,12.346 ccw(c20.201,12.346) 20.201,12.262 20.292,12.262 ccw(c20.292,12.391) 20.383,12.3
  region: 11 vertices and 1 holes, not listed, extent 14.204,11.888 16.314,14.083
  region: 23.156,13.059 22.86,11.888 22.235,11.888 22.517,13.016 22.517,13.108 ccw(c22.441,13.108) 22.441,13.184 22.364,13.184 ccw(c22.364,13.002) 22.235,13.13 22.215,13.11 ccw(c22.332,12.994) 22.179,13.057 21.885,11.888 21.26,11.888 21.671,13.557 22.304,13.557 22.266,13.367 22.331,13.432 cw(c22.744,13.019) 22.744,13.603 22.917,13.603 cw(c22.917,13.317) 23.119,13.519 23.144,13.495 cw(c23.001,13.352) 23.203,13.351 23.21,13.351 23.283,13.424 cw(c23.714,12.994) 23.714,13.603 23.843,13.603 23.851,13.603 cw(c23.851,13.275) 24.178,13.275 23.904,12.147 23.873,12.087 23.805,12.003 23.729,11.949 23.645,11.911 23.553,11.888 23.21,11.888 23.5,13.039 23.5,13.1 ccw(c23.416,13.1) 23.416,13.184 23.34,13.184 ccw(c23.34,13.018) 23.223,13.135 23.176,13.089 ccw(c23.241,13.024) hole: 22.266,13.367 22.258,13.367 22.258,13.359 22.266,13.359
  region: 24.323,12.178 24.216,12.178 24.216,11.888 24.148,11.888 24.148,12.178 24.041,12.178 24.041,12.239 24.323,12.239
  region: 24.628,12.163 24.574,11.888 24.491,11.888 24.437,12.163 24.43,12.163 24.43,11.888 24.361,11.888 24.361,12.239 24.483,12.239 24.533,12.003 24.582,12.239 24.704,12.239 24.704,11.888 24.635,11.888 24.635,12.163
  region: 19.499,13.557 19.088,11.888 18.456,11.888 18.875,13.557
  region: 17.617,14.083 17.061,11.888 16.436,11.888 16.985,14.083
Bottom Overlay:
  circle w0.15: c-22,80.5 r0.25
  circle w0.15: c-21.25,84 r0.25
  lines w0.3: -23.25,73.5 -21.25,73.5 -21.25,84 ; -23.25,77 -22,77 -22,80.5 ; -23.25,80.5 -16.75,80.5 ; -23.25,84 -16.75,84
  text "90-265 VAC" at 26.05,88.7 h1.5
  text "24V / 2A" at -14.45,86.7 h1.5
  text "-" at -15.996,83.242 h1.52
  text "+" at -15.996,79.75 h1.52
  text "L" at 23.5,79.25 h3
  text "N" at 23.5,72.25 h3
Board Shape:
  the board outline again, w0.15

## Text inside footprints (layer, text, board x,y; h text height)
C4: Top Overlay "+" at -1.272,21.928 h1 r180
C14: Top Overlay "+" at -14.357,97.857 h1.5 r90
T1: Top Overlay "1" at -18.5,45.2 h1.5 r90